# Altium PCB PCBChamberRTDs.PcbDoc (part 2 of 2)
Units mil, origin at the board's own origin, x right, y up, seen from the top; angles counter-clockwise.
Board outline 6299.21 x 4724.41 mil, 2 copper layers (Top Layer, Bottom Layer); 132 components, 182 nets, 689 pads, 214 vias.
Unrouted connection lines stored in the file: 100.
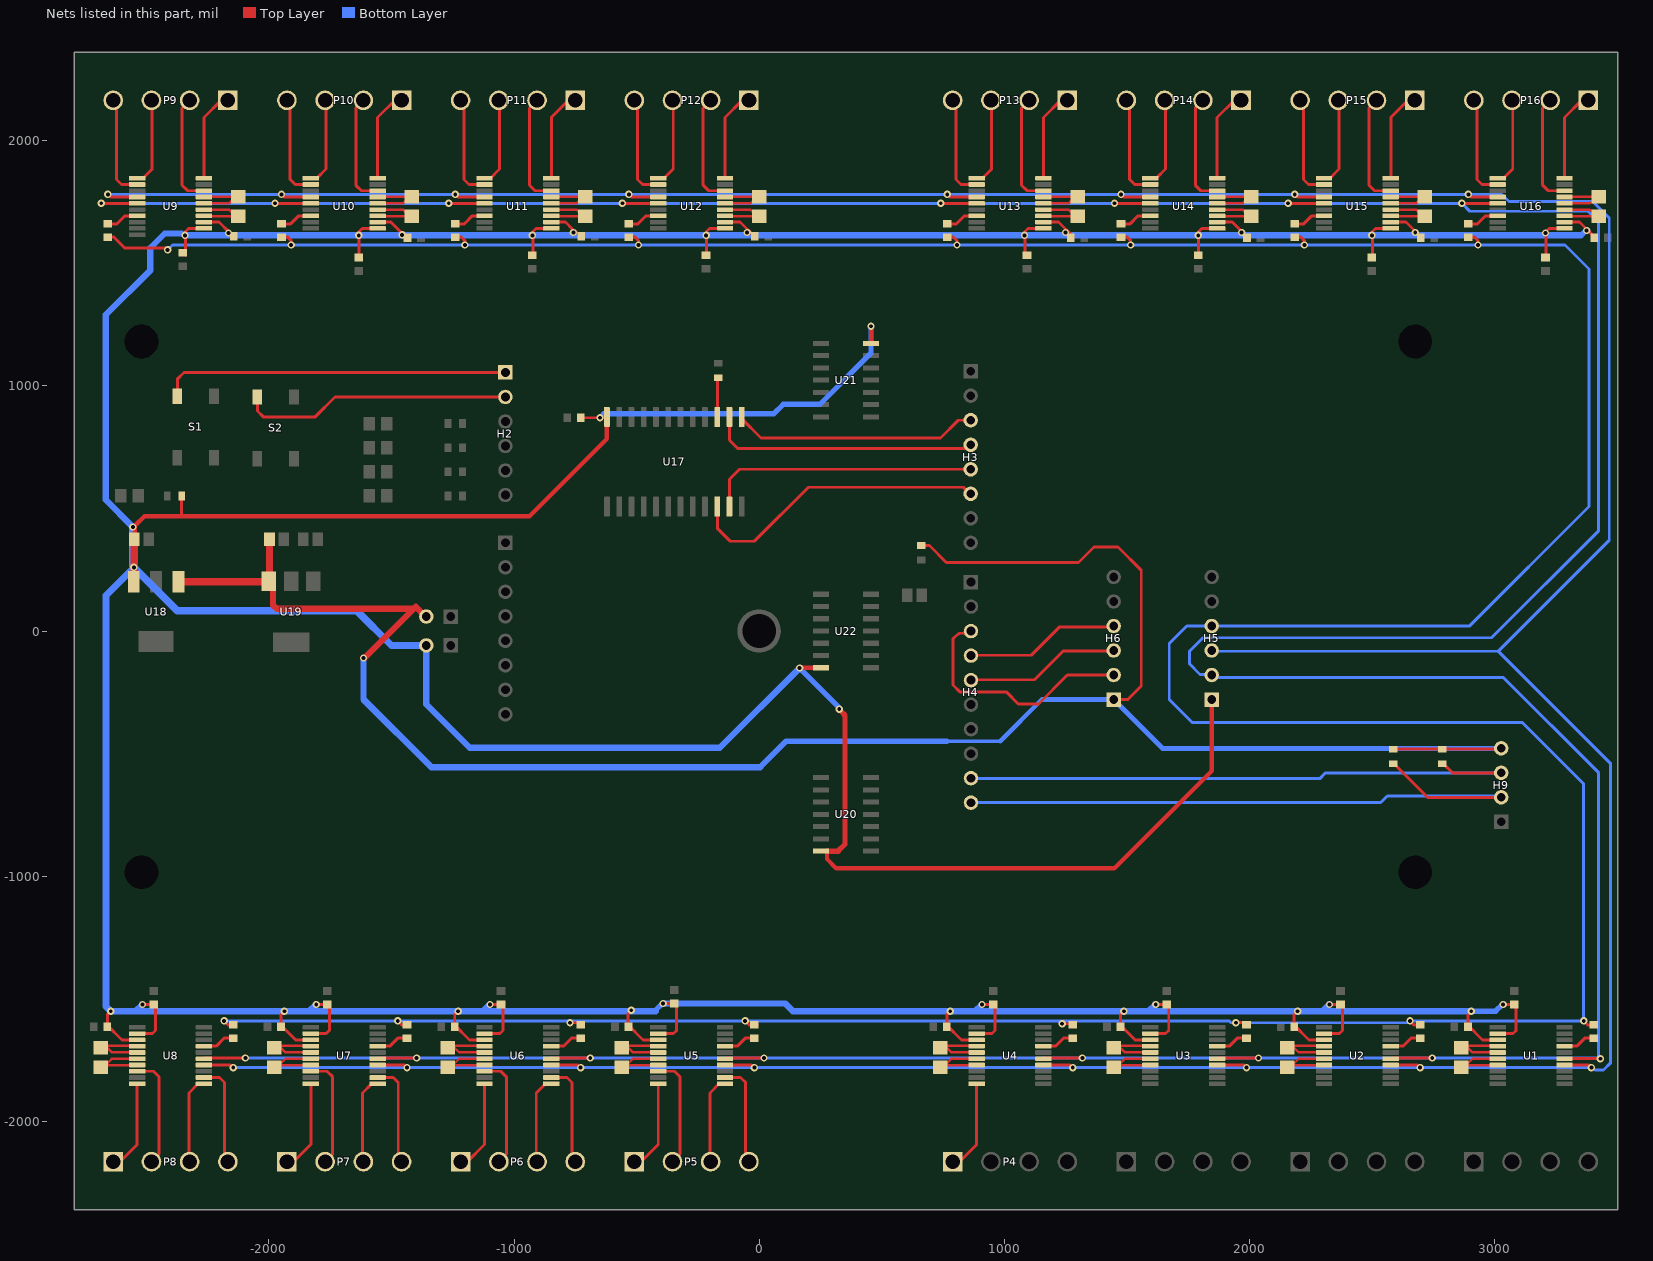
[diagram p2: the nets of this part, all layers, seen from the top]

## Via types
v1: diameter 30, hole 15.75, Top Layer to Bottom Layer, tented both sides, 214 vias

## Nets (pads, with @x,y where several pads share a name; then routed paths per layer and width w, separated by ;. In a path a pad name is that pad's centre, name@x,y a point inside that pad or via, vN(x,y) a via of type N, cw(c..) or ccw(c..) an arc to the next point about the centre after c; other vN are vias at no path point) (continued)
NetP4_4: P4.4 U4.10 | length 347.1
  Top Layer w12: P4.4@816.93,-2165.35 887.4,-2094.88 U4.10@887.4,-1847.44
NetP5_1: P5.1 U5.12 | length 401.9
  Top Layer w12: U5.12@-139.37,-1821.85 -75.79,-1821.85 -55.12,-1842.52 P5.1@-55.12,-2151.57
NetP5_2: P5.2 U5.11 | length 327.5
  Top Layer w12: P5.2@-200.79,-2159.45 -200.79,-1884.84 U5.11@-163.39,-1847.44
NetP5_3: P5.3 U5.8 | length 443.9
  Top Layer w12: U5.8@-411.81,-1796.26 -345.47,-1796.26 -322.83,-1818.9 -322.83,-2133.86 P5.3@-344.49,-2155.51
NetP5_4: P5.4 U5.10 | length 347.1
  Top Layer w12: P5.4@-482.28,-2165.35 -411.81,-2094.88 U5.10@-411.81,-1847.44
NetP6_1: P6.1 U6.12 | length 401.9
  Top Layer w12: U6.12@-848.03,-1821.85 -784.45,-1821.85 -763.78,-1842.52 P6.1@-763.78,-2151.57
NetP6_2: P6.2 U6.11 | length 327.5
  Top Layer w12: P6.2@-909.45,-2159.45 -909.45,-1884.84 U6.11@-872.05,-1847.44
NetP6_3: P6.3 U6.8 | length 443.9
  Top Layer w12: U6.8@-1120.47,-1796.26 -1054.13,-1796.26 -1031.5,-1818.9 -1031.5,-2133.86 P6.3@-1053.15,-2155.51
NetP6_4: P6.4 U6.10 | length 347.1
  Top Layer w12: P6.4@-1190.94,-2165.35 -1120.47,-2094.88 U6.10@-1120.47,-1847.44
NetP7_1: P7.1 U7.12 | length 401.9
  Top Layer w12: U7.12@-1556.69,-1821.85 -1493.11,-1821.85 -1472.44,-1842.52 P7.1@-1472.44,-2151.57
NetP7_2: P7.2 U7.11 | length 327.5
  Top Layer w12: P7.2@-1618.11,-2159.45 -1618.11,-1884.84 U7.11@-1580.71,-1847.44
NetP7_3: P7.3 U7.8 | length 443.9
  Top Layer w12: U7.8@-1829.13,-1796.26 -1762.8,-1796.26 -1740.16,-1818.9 -1740.16,-2133.86 P7.3@-1761.81,-2155.51
NetP7_4: P7.4 U7.10 | length 347.1
  Top Layer w12: P7.4@-1899.61,-2165.35 -1829.13,-2094.88 U7.10@-1829.13,-1847.44
NetP8_1: P8.1 U8.12 | length 401.9
  Top Layer w12: U8.12@-2265.35,-1821.85 -2201.77,-1821.85 -2181.1,-1842.52 P8.1@-2181.1,-2151.57
NetP8_2: P8.2 U8.11 | length 327.5
  Top Layer w12: P8.2@-2326.77,-2159.45 -2326.77,-1884.84 U8.11@-2289.37,-1847.44
NetP8_3: P8.3 U8.8 | length 443.9
  Top Layer w12: U8.8@-2537.8,-1796.26 -2471.46,-1796.26 -2448.82,-1818.9 -2448.82,-2133.86 P8.3@-2470.47,-2155.51
NetP8_4: P8.4 U8.10 | length 347.1
  Top Layer w12: P8.4@-2608.27,-2165.35 -2537.8,-2094.88 U8.10@-2537.8,-1847.44
NetP9_1: P9.1 U9.12 | length 401.9
  Top Layer w12: P9.1@-2622.05,2151.57 -2622.05,1842.52 -2601.38,1821.85 U9.12@-2537.8,1821.85
NetP9_2: P9.2 U9.11 | length 327.5
  Top Layer w12: U9.11@-2513.78,1847.44 -2476.38,1884.84 P9.2@-2476.38,2159.45
NetP9_3: P9.3 U9.8 | length 443.9
  Top Layer w12: P9.3@-2332.68,2155.51 -2354.33,2133.86 -2354.33,1818.9 -2331.69,1796.26 U9.8@-2265.35,1796.26
NetP9_4: P9.4 U9.10 | length 347.1
  Top Layer w12: U9.10@-2265.35,1847.44 -2265.35,2094.88 P9.4@-2194.88,2165.35
NetP10_1: P10.1 U10.12 | length 401.9
  Top Layer w12: P10.1@-1913.39,2151.57 -1913.39,1842.52 -1892.72,1821.85 U10.12@-1829.13,1821.85
NetP10_2: P10.2 U10.11 | length 327.5
  Top Layer w12: U10.11@-1805.12,1847.44 -1767.72,1884.84 P10.2@-1767.72,2159.45
NetP10_3: P10.3 U10.8 | length 443.9
  Top Layer w12: P10.3@-1624.02,2155.51 -1645.67,2133.86 -1645.67,1818.9 -1623.03,1796.26 U10.8@-1556.69,1796.26
NetP10_4: P10.4 U10.10 | length 347.1
  Top Layer w12: U10.10@-1556.69,1847.44 -1556.69,2094.88 P10.4@-1486.22,2165.35
NetP11_1: P11.1 U11.12 | length 401.9
  Top Layer w12: P11.1@-1204.72,2151.57 -1204.72,1842.52 -1184.05,1821.85 U11.12@-1120.47,1821.85
NetP11_2: P11.2 U11.11 | length 327.5
  Top Layer w12: U11.11@-1096.46,1847.44 -1059.05,1884.84 P11.2@-1059.05,2159.45
NetP11_3: P11.3 U11.8 | length 443.9
  Top Layer w12: P11.3@-915.35,2155.51 -937.01,2133.86 -937.01,1818.9 -914.37,1796.26 U11.8@-848.03,1796.26
NetP11_4: P11.4 U11.10 | length 347.1
  Top Layer w12: U11.10@-848.03,1847.44 -848.03,2094.88 P11.4@-777.56,2165.35
NetP12_1: P12.1 U12.12 | length 401.9
  Top Layer w12: P12.1@-496.06,2151.57 -496.06,1842.52 -475.39,1821.85 U12.12@-411.81,1821.85
NetP12_2: P12.2 U12.11 | length 327.5
  Top Layer w12: U12.11@-387.8,1847.44 -350.39,1884.84 P12.2@-350.39,2159.45
NetP12_3: P12.3 U12.8 | length 443.9
  Top Layer w12: P12.3@-206.69,2155.51 -228.35,2133.86 -228.35,1818.9 -205.71,1796.26 U12.8@-139.37,1796.26
NetP12_4: P12.4 U12.10 | length 347.1
  Top Layer w12: U12.10@-139.37,1847.44 -139.37,2094.88 P12.4@-68.9,2165.35
NetP13_1: P13.1 U13.12 | length 401.9
  Top Layer w12: P13.1@803.15,2151.57 803.15,1842.52 823.82,1821.85 U13.12@887.4,1821.85
NetP13_2: P13.2 U13.11 | length 327.5
  Top Layer w12: U13.11@911.42,1847.44 948.82,1884.84 P13.2@948.82,2159.45
NetP13_3: P13.3 U13.8 | length 443.9
  Top Layer w12: P13.3@1092.52,2155.51 1070.87,2133.86 1070.87,1818.9 1093.5,1796.26 U13.8@1159.84,1796.26
NetP13_4: P13.4 U13.10 | length 347.1
  Top Layer w12: U13.10@1159.84,1847.44 1159.84,2094.88 P13.4@1230.32,2165.35
NetP14_1: P14.1 U14.12 | length 401.9
  Top Layer w12: P14.1@1511.81,2151.57 1511.81,1842.52 1532.48,1821.85 U14.12@1596.06,1821.85
NetP14_2: P14.2 U14.11 | length 327.5
  Top Layer w12: U14.11@1620.08,1847.44 1657.48,1884.84 P14.2@1657.48,2159.45
NetP14_3: P14.3 U14.8 | length 443.9
  Top Layer w12: P14.3@1801.18,2155.51 1779.53,2133.86 1779.53,1818.9 1802.17,1796.26 U14.8@1868.5,1796.26
NetP14_4: P14.4 U14.10 | length 347.1
  Top Layer w12: U14.10@1868.5,1847.44 1868.5,2094.88 P14.4@1938.98,2165.35
NetP15_1: P15.1 U15.12 | length 401.9
  Top Layer w12: P15.1@2220.47,2151.57 2220.47,1842.52 2241.14,1821.85 U15.12@2304.72,1821.85
NetP15_2: P15.2 U15.11 | length 327.5
  Top Layer w12: U15.11@2328.74,1847.44 2366.14,1884.84 P15.2@2366.14,2159.45
NetP15_3: P15.3 U15.8 | length 443.9
  Top Layer w12: P15.3@2509.84,2155.51 2488.19,2133.86 2488.19,1818.9 2510.83,1796.26 U15.8@2577.17,1796.26
NetP15_4: P15.4 U15.10 | length 347.1
  Top Layer w12: U15.10@2577.17,1847.44 2577.17,2094.88 P15.4@2647.64,2165.35
NetP16_1: P16.1 U16.12 | length 401.9
  Top Layer w12: P16.1@2929.13,2151.57 2929.13,1842.52 2949.8,1821.85 U16.12@3013.39,1821.85
NetP16_2: P16.2 U16.11 | length 327.5
  Top Layer w12: U16.11@3037.4,1847.44 3074.8,1884.84 P16.2@3074.8,2159.45
NetP16_3: P16.3 U16.8 | length 443.9
  Top Layer w12: P16.3@3218.5,2155.51 3196.85,2133.86 3196.85,1818.9 3219.49,1796.26 U16.8@3285.83,1796.26
NetP16_4: P16.4 U16.10 | length 347.1
  Top Layer w12: U16.10@3285.83,1847.44 3285.83,2094.88 P16.4@3356.3,2165.35
NetR1_1: R1.1 U1.17 | length 143
  Top Layer w12: U1.17@3285.83,-1693.9 3335.63,-1693.9 3368.11,-1661.42 R1.1@3415.35,-1661.42
NetR2_1: R2.1 U2.17 | length 143
  Top Layer w12: U2.17@2577.17,-1693.9 2626.97,-1693.9 2659.45,-1661.42 R2.1@2706.69,-1661.42
NetR3_1: R3.1 U3.17 | length 143
  Top Layer w12: U3.17@1868.5,-1693.9 1918.31,-1693.9 1950.79,-1661.42 R3.1@1998.03,-1661.42
NetR4_1: R4.1 U1.6 U1.7 | length 261.2
  Top Layer w10: U1.7@3008.46,-1771.65 2883.86,-1771.65 2910.43,-1745.08 U1.6@3009.45,-1745.08
NetR4_2: R4.2 U1.4 U1.5 | length 261.2
  Top Layer w10: U1.4@3008.46,-1692.91 2883.86,-1692.91 2910.43,-1719.49 U1.5@3009.45,-1719.49
NetR5_1: R5.1 U2.6 U2.7 | length 261.2
  Top Layer w10: U2.7@2299.8,-1771.65 2175.2,-1771.65 2201.77,-1745.08 U2.6@2300.79,-1745.08
NetR5_2: R5.2 U2.4 U2.5 | length 261.2
  Top Layer w10: U2.4@2299.8,-1692.91 2175.2,-1692.91 2201.77,-1719.49 U2.5@2300.79,-1719.49
NetR6_1: R6.1 U3.6 U3.7 | length 261.2
  Top Layer w10: U3.7@1591.14,-1771.65 1466.54,-1771.65 1493.11,-1745.08 U3.6@1592.13,-1745.08
NetR6_2: R6.2 U3.4 U3.5 | length 261.2
  Top Layer w10: U3.4@1591.14,-1692.91 1466.54,-1692.91 1493.11,-1719.49 U3.5@1592.13,-1719.49
NetR7_1: R7.1 U4.17 | length 143
  Top Layer w12: U4.17@1159.84,-1693.9 1209.65,-1693.9 1242.13,-1661.42 R7.1@1289.37,-1661.42
NetR8_1: R8.1 U5.17 | length 143
  Top Layer w12: U5.17@-139.37,-1693.9 -89.57,-1693.9 -57.09,-1661.42 R8.1@-9.84,-1661.42
NetR9_1: R9.1 U6.17 | length 143
  Top Layer w12: U6.17@-848.03,-1693.9 -798.23,-1693.9 -765.75,-1661.42 R9.1@-718.5,-1661.42
NetR10_1: R10.1 U4.6 U4.7 | length 261.2
  Top Layer w10: U4.7@882.48,-1771.65 757.87,-1771.65 784.45,-1745.08 U4.6@883.46,-1745.08
NetR10_2: R10.2 U4.4 U4.5 | length 261.2
  Top Layer w10: U4.4@882.48,-1692.91 757.87,-1692.91 784.45,-1719.49 U4.5@883.46,-1719.49
NetR11_1: R11.1 U5.6 U5.7 | length 261.2
  Top Layer w10: U5.7@-416.73,-1771.65 -541.34,-1771.65 -514.76,-1745.08 U5.6@-415.75,-1745.08
NetR11_2: R11.2 U5.4 U5.5 | length 261.2
  Top Layer w10: U5.4@-416.73,-1692.91 -541.34,-1692.91 -514.76,-1719.49 U5.5@-415.75,-1719.49
NetR12_1: R12.1 U6.6 U6.7 | length 261.2
  Top Layer w10: U6.7@-1125.39,-1771.65 -1250,-1771.65 -1223.42,-1745.08 U6.6@-1124.41,-1745.08
NetR12_2: R12.2 U6.4 U6.5 | length 261.2
  Top Layer w10: U6.4@-1125.39,-1692.91 -1250,-1692.91 -1223.42,-1719.49 U6.5@-1124.41,-1719.49
NetR13_1: R13.1 U7.17 | length 143
  Top Layer w12: U7.17@-1556.69,-1693.9 -1506.89,-1693.9 -1474.41,-1661.42 R13.1@-1427.17,-1661.42
NetR14_1: R14.1 U8.17 | length 143
  Top Layer w12: U8.17@-2265.35,-1693.9 -2215.55,-1693.9 -2183.07,-1661.42 R14.1@-2135.83,-1661.42
NetR15_1: R15.1 U9.17 | length 143
  Top Layer w12: R15.1@-2667.32,1661.42 -2620.08,1661.42 -2587.6,1693.9 U9.17@-2537.8,1693.9
NetR16_1: R16.1 U7.6 U7.7 | length 261.2
  Top Layer w10: U7.7@-1834.05,-1771.65 -1958.66,-1771.65 -1932.09,-1745.08 U7.6@-1833.07,-1745.08
NetR16_2: R16.2 U7.4 U7.5 | length 261.2
  Top Layer w10: U7.4@-1834.06,-1692.91 -1958.66,-1692.91 -1932.09,-1719.49 U7.5@-1833.07,-1719.49
NetR17_1: R17.1 U8.6 U8.7 | length 262.6
  Top Layer w10: U8.7@-2542.72,-1771.65 -2667.32,-1771.65 -2640.75,-1745.08 U8.6@-2541.73,-1745.08
  Top Layer w12: U8.7@-2538.78,-1771.65 U8.7@-2537.8,-1770.67
NetR17_2: R17.2 U8.4 U8.5 | length 262.6
  Top Layer w10: U8.4@-2542.72,-1692.91 -2667.32,-1692.91 -2640.75,-1719.49 U8.5@-2541.73,-1719.49
  Top Layer w12: U8.4@-2538.78,-1692.91 U8.4@-2537.8,-1693.9
NetR18_1: R18.1 U10.17 | length 143
  Top Layer w12: R18.1@-1958.66,1661.42 -1911.42,1661.42 -1878.94,1693.9 U10.17@-1829.13,1693.9
NetR19_1: R19.1 U11.17 | length 143
  Top Layer w12: R19.1@-1250,1661.42 -1202.76,1661.42 -1170.28,1693.9 U11.17@-1120.47,1693.9
NetR20_1: R20.1 U9.6 U9.7 | length 261.2
  Top Layer w10: U9.6@-2261.42,1745.08 -2162.4,1745.08 -2135.83,1771.65 U9.7@-2260.43,1771.65
NetR20_2: R20.2 U9.4 U9.5 | length 261.2
  Top Layer w10: U9.5@-2261.42,1719.49 -2162.4,1719.49 -2135.83,1692.91 U9.4@-2260.43,1692.91
NetR21_1: R21.1 U10.6 U10.7 | length 261.2
  Top Layer w10: U10.6@-1552.76,1745.08 -1453.74,1745.08 -1427.17,1771.65 U10.7@-1551.77,1771.65
NetR21_2: R21.2 U10.4 U10.5 | length 261.2
  Top Layer w10: U10.5@-1552.76,1719.49 -1453.74,1719.49 -1427.17,1692.91 U10.4@-1551.77,1692.91
NetR22_1: R22.1 U11.6 U11.7 | length 261.2
  Top Layer w10: U11.6@-844.09,1745.08 -745.08,1745.08 -718.5,1771.65 U11.7@-843.11,1771.65
NetR22_2: R22.2 U11.4 U11.5 | length 261.2
  Top Layer w10: U11.5@-844.09,1719.49 -745.08,1719.49 -718.5,1692.91 U11.4@-843.11,1692.91
NetR23_1: R23.1 U12.17 | length 143
  Top Layer w12: R23.1@-541.34,1661.42 -494.09,1661.42 -461.61,1693.9 U12.17@-411.81,1693.9
NetR24_1: R24.1 U13.17 | length 143
  Top Layer w12: R24.1@757.87,1661.42 805.12,1661.42 837.6,1693.9 U13.17@887.4,1693.9
NetR25_1: R25.1 U14.17 | length 143
  Top Layer w12: R25.1@1466.54,1661.42 1513.78,1661.42 1546.26,1693.9 U14.17@1596.06,1693.9
NetR26_1: R26.1 U12.6 U12.7 | length 261.2
  Top Layer w10: U12.6@-135.43,1745.08 -36.42,1745.08 -9.84,1771.65 U12.7@-134.45,1771.65
NetR26_2: R26.2 U12.4 U12.5 | length 261.2
  Top Layer w10: U12.5@-135.43,1719.49 -36.42,1719.49 -9.84,1692.91 U12.4@-134.45,1692.91
NetR27_1: R27.1 U13.6 U13.7 | length 261.2
  Top Layer w10: U13.6@1163.78,1745.08 1262.8,1745.08 1289.37,1771.65 U13.7@1164.76,1771.65
NetR27_2: R27.2 U13.4 U13.5 | length 261.2
  Top Layer w10: U13.5@1163.78,1719.49 1262.8,1719.49 1289.37,1692.91 U13.4@1164.76,1692.91
NetR28_1: R28.1 U14.6 U14.7 | length 261.2
  Top Layer w10: U14.6@1872.44,1745.08 1971.46,1745.08 1998.03,1771.65 U14.7@1873.43,1771.65
NetR28_2: R28.2 U14.4 U14.5 | length 261.2
  Top Layer w10: U14.5@1872.44,1719.49 1971.46,1719.49 1998.03,1692.91 U14.4@1873.43,1692.91
NetR29_1: R29.1 U15.17 | length 143
  Top Layer w12: R29.1@2175.2,1661.42 2222.44,1661.42 2254.92,1693.9 U15.17@2304.72,1693.9
NetR30_1: R30.1 U16.17 | length 143
  Top Layer w12: R30.1@2883.86,1661.42 2931.1,1661.42 2963.58,1693.9 U16.17@3013.39,1693.9
NetR31_1: R31.1 U15.6 U15.7 | length 261.2
  Top Layer w10: U15.6@2581.1,1745.08 2680.12,1745.08 2706.69,1771.65 U15.7@2582.09,1771.65
NetR31_2: R31.2 U15.4 U15.5 | length 261.2
  Top Layer w10: U15.5@2581.1,1719.49 2680.12,1719.49 2706.69,1692.91 U15.4@2582.09,1692.91
NetR32_1: R32.1 U16.6 U16.7 | length 261.2
  Top Layer w10: U16.6@3289.76,1745.08 3388.78,1745.08 3415.35,1771.65 U16.7@3290.75,1771.65
NetR32_2: R32.2 U16.4 U16.5 | length 261.2
  Top Layer w10: U16.5@3289.76,1719.49 3388.78,1719.49 3415.35,1692.91 U16.4@3290.75,1692.91
NetR33_1: R33.1 U17.15 | length 161.9
  Top Layer w12: U17.15@-171.26,873.23 -169.29,875.2 -169.29,1031.5 R33.1@-167.32,1033.46
S0: H3.6 U17.10 | length 1247.5
  Top Layer w12: U17.10@-171.26,507.87 -169.29,505.91 -169.29,417.32 -118.11,366.14 -19.68,366.14 200.79,586.61 832.75,586.61 859.41,559.95 H3.6@863.31,559.95
S1: H3.5 U17.11 | length 1119.4
  Top Layer w12: U17.11@-121.26,507.87 -121.26,618.9 -80.2,659.95 H3.5@863.31,659.95 H3.5@870.08,659.95
S2: H3.4 U17.14 | length 1100
  Top Layer w12: U17.14@-121.26,873.23 -121.26,778.74 -86.61,744.09 834.72,744.09 850.58,759.95 H3.4@863.31,759.95
S3: H3.3 U17.13 | length 1004.5
  Top Layer w12: U17.13@-71.26,873.23 -71.26,865.76 7.1,787.4 740.16,787.4 812.71,859.95 H3.3@863.31,859.95
SCL: H4.10 H9.2 R41.2 | length 2675.3
  Top Layer w12: R41.2@2586.42,-541.54 R41.2@2586.61,-541.34 2590.55,-541.34 2727.95,-678.74 H9.2@3027.56,-678.74 H9.2@3027.36,-678.94
  Bottom Layer w12: H4.10@864.17,-700.2 2536.02,-700.2 2562.99,-673.23 3022.05,-673.23 H9.2@3027.56,-678.74
SCLK: H5.2 U1.15 U2.15 U3.15 U4.15 U5.15 U6.15 U7.15 U8.15 U9.15 U10.15 U11.15 U12.15 U13.15 U14.15 U15.15 U16.15 | length 20349.1
  Top Layer w12: v1(-2684.05,1745.08) U9.15@-2537.8,1745.08 ; U8.15@-2265.35,-1745.08 -2262.4,-1742.13 -2116.14,-1742.13 v1(-2096.46,-1742.13) ; v1(-1975.39,1745.08) U10.15@-1829.13,1745.08 ; U7.15@-1556.69,-1745.08 -1553.74,-1742.13 v1(-1397.64,-1742.13) ; v1(-1266.73,1745.08) U11.15@-1120.47,1745.08 ; U6.15@-848.03,-1745.08 -845.08,-1742.13 v1(-688.98,-1742.13) ; v1(-558.07,1745.08) U12.15@-411.81,1745.08 ; U5.15@-139.37,-1745.08 -136.42,-1742.13 v1(19.69,-1742.13) ; v1(741.14,1745.08) U13.15@887.4,1745.08 ; U4.15@1159.84,-1745.08 1162.8,-1742.13 v1(1318.9,-1742.13) ; v1(1449.8,1745.08) U14.15@1596.06,1745.08 ; U3.15@1868.5,-1745.08 1871.46,-1742.13 v1(2037.4,-1742.13) ; v1(2158.46,1745.08) U15.15@2304.72,1745.08 ; U2.15@2577.17,-1745.08 2580.13,-1742.12 v1(2746.06,-1742.12) ; v1(2867.13,1745.08) U16.15@3013.39,1745.08 ; U1.15@3285.83,-1745.08 v1(3432.09,-1745.08)
  Bottom Layer w12: v1(-2684.05,1745.08) v1(-1975.39,1745.08) v1(-1266.73,1745.08) v1(-558.07,1745.08) v1(741.14,1745.08) v1(1449.8,1745.08) v1(2158.46,1745.08) v1(2867.13,1745.08) 2899.61,1712.6 3381.89,1712.6 3425.2,1669.29 3425.2,409.45 2988.19,-27.56 2917.32,-27.56 ; v1(-2096.46,-1742.13) v1(-1397.64,-1742.13) v1(-688.98,-1742.13) v1(19.69,-1742.13) v1(1318.9,-1742.13) v1(2037.4,-1742.13) ; v1(2037.4,-1742.13) v1(2746.06,-1742.12) 3429.13,-1742.12 v1(3432.09,-1745.08) 3432.09,-1740.21 3425.2,-1733.32 3425.2,-578.74 3035.43,-188.98 1877.05,-188.98 1876.61,-188.53 1855.5,-188.53 1843.89,-176.92 1798.97,-176.92 1755.91,-133.86 1755.91,-82.68 1811.02,-27.56 2921.26,-27.56
SCLK-H: H4.3 H6.2 | length 1010.8
  Top Layer w12: H4.3@864.17,-0.2 855.17,-9.2 817.57,-9.2 814.96,-11.81 811.02,-11.81 791.34,-31.5 791.34,-220.47 818.9,-248.03 1007.87,-248.03 1057.48,-297.64 1139.37,-297.64 1257.48,-179.53 H6.2@1446.5,-179.53
SDA: H4.9 H9.3 R40.2 | length 2433.7
  Top Layer w12: R40.2@2783.46,-541.34 R40.2@2787.4,-541.34 2791.34,-541.34 2828.74,-578.74 H9.3@3027.56,-578.74
  Bottom Layer w12: H4.9@864.17,-600.2 866.34,-602.36 2287.4,-602.36 2311.02,-578.74 H9.3@3027.56,-578.74
SDI: H5.3 U1.14 U2.14 U3.14 U4.14 U5.14 U6.14 U7.14 U8.14 U9.14 U10.14 U11.14 U12.14 U13.14 U14.14 U15.14 U16.14 | length 18774.1
  Top Layer w12: v1(-2657.48,1781.5) -2646.65,1770.67 U9.14@-2537.8,1770.67 ; U8.14@-2265.35,-1770.67 -2156.5,-1770.67 v1(-2145.67,-1781.5) ; v1(-1948.82,1781.5) -1937.99,1770.67 U10.14@-1829.13,1770.67 ; U7.14@-1556.69,-1770.67 -1447.83,-1770.67 v1(-1437.01,-1781.5) ; v1(-1240.16,1781.5) -1229.33,1770.67 U11.14@-1120.47,1770.67 ; U6.14@-848.03,-1770.67 -739.17,-1770.67 v1(-728.35,-1781.5) ; v1(-531.5,1781.5) -520.67,1770.67 U12.14@-411.81,1770.67 ; U5.14@-139.37,-1770.67 -30.51,-1770.67 v1(-19.68,-1781.5) ; v1(767.72,1781.5) 778.54,1770.67 U13.14@887.4,1770.67 ; U4.14@1159.84,-1770.67 1268.7,-1770.67 v1(1279.53,-1781.5) ; v1(1476.38,1781.5) 1487.2,1770.67 U14.14@1596.06,1770.67 ; U3.14@1868.5,-1770.67 1977.36,-1770.67 v1(1988.19,-1781.5) ; v1(2185.04,1781.5) 2195.87,1770.67 U15.14@2304.72,1770.67 ; U2.14@2577.17,-1770.67 2686.02,-1770.67 v1(2696.85,-1781.5) ; v1(2893.7,1781.5) 2904.53,1770.67 U16.14@3013.39,1770.67 ; U1.14@3285.83,-1770.67 3384.84,-1770.67 v1(3395.67,-1781.5)
  Bottom Layer w12: v1(-2657.48,1781.5) v1(-1948.82,1781.5) v1(-1240.16,1781.5) v1(-531.5,1781.5) v1(767.72,1781.5) v1(1476.38,1781.5) v1(2185.04,1781.5) v1(2893.7,1781.5) 3029.53,1781.5 3059.06,1751.97 3401.57,1751.97 3468.5,1685.04 3468.5,370.08 3015.75,-82.68 ; v1(-2145.67,-1781.5) v1(-1437.01,-1781.5) v1(-728.35,-1781.5) v1(-19.68,-1781.5) v1(1279.53,-1781.5) v1(1988.19,-1781.5) v1(2696.85,-1781.5) v1(3395.67,-1781.5) 3400.54,-1781.5 3410.38,-1791.34 3444.88,-1791.34 3474.41,-1761.81 3474.41,-541.34 3019.69,-86.61 3015.75,-82.68 ; H5.3@1846.5,-79.53 1849.65,-82.68 3015.75,-82.68
SDI-H: H4.5 H6.3 | length 632.3
  Top Layer w12: H4.5@864.17,-200.2 865.45,-198.92 1123.92,-198.92 1242.03,-80.81 1445.22,-80.81 H6.3@1446.5,-79.53
SDO: H5.4 R1.2 R2.2 R3.2 R7.2 R8.2 R9.2 R13.2 R14.2 R15.2 R18.2 R19.2 R23.2 R24.2 R25.2 R29.2 R30.2 | length 18583.9
  Top Layer w12: R15.2@-2665.35,1608.27 -2633.86,1608.27 -2588.58,1562.99 -2421.26,1562.99 v1(-2413.39,1555.12) ; v1(-2183.07,-1590.55) -2165.35,-1608.27 R14.2@-2133.86,-1608.27 ; R18.2@-1956.69,1608.27 -1925.2,1608.27 -1909.45,1592.52 v1(-1909.45,1574.8) ; v1(-1474.41,-1590.55) -1456.69,-1608.27 R13.2@-1425.2,-1608.27 ; R19.2@-1248.03,1608.27 -1216.54,1608.27 -1200.79,1592.52 v1(-1200.79,1574.8) ; v1(-771.65,-1598.43) -726.38,-1598.43 R9.2@-720.47,-1604.33 ; R23.2@-539.37,1608.27 -507.87,1608.27 -492.13,1592.52 v1(-492.13,1574.8) ; v1(-57.09,-1590.55) -39.37,-1608.27 R8.2@-7.87,-1608.27 ; R24.2@759.84,1608.27 791.34,1608.27 807.09,1592.52 v1(807.09,1574.8) ; v1(1236.22,-1602.36) 1289.37,-1602.36 R7.2@1291.34,-1604.33 ; R25.2@1468.5,1608.27 1500,1608.27 1515.75,1592.52 v1(1515.75,1574.8) ; v1(1944.88,-1598.43) 1946.76,-1596.55 1978.44,-1596.55 R3.2@1988.19,-1606.3 ; R3.2@1988.19,-1608.27 R3.2@1996.06,-1608.27 ; R29.2@2177.17,1608.27 2208.66,1608.27 2224.41,1592.52 v1(2224.41,1574.8) ; v1(2655.51,-1590.55) 2673.23,-1608.27 R2.2@2704.72,-1608.27 ; R30.2@2885.83,1608.27 2917.32,1608.27 2933.07,1592.52 v1(2933.07,1574.8) ; v1(3364.17,-1590.55) 3381.89,-1608.27 R1.2@3413.39,-1608.27
  Bottom Layer w12: v1(-2413.39,1555.12) -2393.7,1574.8 v1(-1909.45,1574.8) v1(-1200.79,1574.8) v1(-492.13,1574.8) v1(807.09,1574.8) v1(1515.75,1574.8) v1(2224.41,1574.8) v1(2933.07,1574.8) 3287.94,1574.8 3385.83,1476.91 3385.83,507.87 2897.64,19.69 2850.39,19.69 ; v1(-2183.07,-1590.55) v1(-1474.41,-1590.55) -771.65,-1590.55 v1(-57.09,-1590.55) 1220.47,-1590.55 ; v1(1236.22,-1602.36) 1232.28,-1602.36 1220.47,-1590.55 ; 2847.24,20.47 H5.4@1846.5,20.47 1744.88,20.47 1673.23,-51.18 1673.23,-279.53 1767.72,-374.02 3114.17,-374.02 3364.17,-624.02 v1(3364.17,-1590.55) v1(2655.51,-1590.55) 2647.64,-1598.43 v1(1944.88,-1598.43) 1925.2,-1598.43 1917.32,-1590.55 1236.22,-1590.55 1220.47,-1590.55
SDO-H: H4.4 H6.4 | length 622.7
  Top Layer w12: H4.4@864.17,-100.2 865.45,-98.92 1109.74,-98.92 1224.41,15.75 H6.4@1437.01,15.75 ; H6.4@1445.22,19.19 H6.4@1446.5,20.47
SW1: H2.1 S1.2 | length 1419
  Top Layer w12: S1.2@-2374.02,958.66 -2374.02,1027.56 -2346.62,1054.95 H2.1@-1035.24,1054.95
SW2: H2.2 S2.2 | length 1112.4
  Top Layer w12: S2.2@-2047.24,954.72 -2047.24,897.64 -2023.62,874.02 -1811.02,874.02 -1730.09,954.95 H2.2@-1035.24,954.95
V3.3: C1.2 C2.2 C3.2 C4.2 C5.2 C6.2 C7.2 C8.2 C9.2 C10.2 C11.2 C12.2 C13.2 C14.2 C15.2 C16.2 C17.2 C18.2 C19.2 C20.2 C21.2 C22.2 C23.2 C24.2 C25.2 C26.2 C27.2 C28.2 C29.2 C30.2 C31.2 C32.2 C33.1 C36.2 H5.1 H7.2 R38.1 U1.2 U1.3 U2.2 U2.3 U3.2 U3.3 U4.2 U4.3 U5.2 U5.3 U6.2 U6.3 U7.2 U7.3 U8.2 U8.3 U9.2 U9.3 U10.2 U10.3 U11.2 U11.3 U12.2 U12.3 U13.2 U13.3 U14.2 U14.3 U15.2 U15.3 U16.2 U16.3 U17.24 U18.3 U20.14 U21.14 U22.14 | length 31486
  Top Layer w12: C14.2@-2659.45,-1614.17 -2659.45,-1564.96 v1(-2645.67,-1551.18) ; C14.2@-2659.45,-1606.3 -2659.45,-1608.27 -2599.41,-1668.31 U8.3@-2537.8,-1668.31 ; U18.3@-2551.63,200.74 U18.3@-2549.21,203.16 ; v1@-2549.21,431.1 v1@-2547.24,429.13 ; U8.2@-2537.8,-1642.72 -2475.39,-1642.72 -2462.6,-1629.92 -2462.6,-1531.5 C17.2@-2470.47,-1523.62 v1(-2515.75,-1523.62) ; R38.1@-2356.3,551.18 -2356.3,470.47 -2354.33,468.5 ; C20.2@-2340.55,1531.5 -2340.55,1629.92 -2327.76,1642.72 U9.2@-2265.35,1642.72 ; U9.3@-2265.35,1668.31 -2203.74,1668.31 v1@-2162.4,1626.97 ; C13.2@-1950.79,-1614.17 -1950.79,-1564.96 v1(-1937.01,-1551.18) ; C13.2@-1950.79,-1608.27 -1890.75,-1668.31 U7.3@-1829.13,-1668.31 ; U7.2@-1829.13,-1642.72 -1766.73,-1642.72 -1753.94,-1629.92 -1753.94,-1531.5 C16.2@-1761.81,-1523.62 v1(-1807.09,-1523.62) ; C21.2@-1631.89,1531.5 v1@-1631.89,1614.17 ; -1631.89,1629.92 -1619.09,1642.72 U10.2@-1556.69,1642.72 ; U10.3@-1556.69,1668.31 -1502.95,1668.31 -1460.14,1625.49 -1460.14,1619.59 v1(-1456.69,1616.14) ; C9.2@-1242.13,-1614.17 -1242.13,-1564.96 v1(-1228.35,-1551.18) ; C9.2@-1242.13,-1608.27 -1182.09,-1668.31 U6.3@-1120.47,-1668.31 ; U6.2@-1120.47,-1642.72 -1058.07,-1642.72 -1045.28,-1629.92 C12.2@-1045.28,-1531.5 ; v1(-1098.42,-1523.62) C12.2@-1053.15,-1523.62 ; C22.2@-923.23,1531.5 v1@-923.23,1614.17 ; -923.23,1629.92 -910.43,1642.72 U11.2@-848.03,1642.72 ; U11.3@-848.03,1668.31 -790.35,1668.31 -761.32,1639.27 -761.32,1629.43 v1(-757.87,1625.98) ; v1@-750.98,1632.87 C19.2@-726.38,1608.27 ; C33.1@-728.35,870.08 -624.41,870.08 U17.24@-621.26,873.23 ; C8.2@-535.43,-1610.24 -535.43,-1561.02 v1(-521.65,-1547.24) ; C8.2@-533.46,-1608.27 -473.42,-1668.31 U5.3@-411.81,-1668.31 ; U5.2@-411.81,-1642.72 -349.41,-1642.72 -336.61,-1629.92 C11.2@-336.61,-1531.5 ; v1(-391.73,-1519.69) C11.2@-346.46,-1519.69 ; C26.2@-214.57,1531.5 v1@-214.57,1614.17 ; -214.57,1629.92 -201.77,1642.72 U12.2@-139.37,1642.72 ; U12.3@-139.37,1668.31 -77.76,1668.31 C23.2@-17.72,1608.27 ; C7.2@765.75,-1614.17 765.75,-1564.96 v1(779.53,-1551.18) ; C7.2@765.75,-1608.27 825.79,-1668.31 U4.3@887.4,-1668.31 ; U4.2@887.4,-1642.72 949.8,-1642.72 962.6,-1629.92 C10.2@962.6,-1531.5 ; v1(909.45,-1523.62) C10.2@954.73,-1523.62 ; C27.2@1084.65,1531.5 v1@1084.65,1614.17 ; 1084.65,1629.92 1097.44,1642.72 U13.2@1159.84,1642.72 ; U13.3@1159.84,1668.31 1221.46,1668.31 C24.2@1281.5,1608.27 ; C3.2@1474.41,-1614.17 1474.41,-1564.96 v1(1488.19,-1551.18) ; C3.2@1474.41,-1608.27 1534.45,-1668.31 U3.3@1596.06,-1668.31 ; U3.2@1596.06,-1642.72 1658.46,-1642.72 1671.26,-1629.92 C6.2@1671.26,-1531.5 ; v1(1618.11,-1523.62) C6.2@1663.39,-1523.62 ; C28.2@1793.31,1531.5 v1@1793.31,1614.17 ; 1793.31,1629.92 1806.1,1642.72 U14.2@1868.5,1642.72 ; U14.3@1868.5,1668.31 1930.12,1668.31 C25.2@1990.16,1608.27 ; C2.2@2183.07,-1614.17 2183.07,-1564.96 v1(2196.85,-1551.18) ; C2.2@2183.07,-1608.27 2243.11,-1668.31 U2.3@2304.72,-1668.31 ; U2.2@2304.72,-1642.72 2367.13,-1642.72 2379.92,-1629.92 C5.2@2379.92,-1531.5 ; v1(2326.77,-1523.62) C5.2@2372.05,-1523.62 ; C31.2@2501.97,1531.5 v1@2501.97,1614.17 ; 2501.97,1629.92 2514.76,1642.72 U15.2@2577.17,1642.72 ; U15.3@2577.17,1668.31 2638.78,1668.31 C29.2@2698.82,1608.27 ; C1.2@2891.73,-1614.17 2891.73,-1564.96 v1(2905.51,-1551.18) ; C1.2@2891.73,-1608.27 2951.77,-1668.31 U1.3@3013.39,-1668.31 ; U1.2@3013.39,-1642.72 3075.79,-1642.72 3088.58,-1629.92 C4.2@3088.58,-1531.5 ; v1(3035.43,-1523.62) C4.2@3080.71,-1523.62 ; C30.2@3210.63,1531.5 3210.63,1629.92 3223.43,1642.72 U16.2@3285.83,1642.72 ; U16.3@3285.83,1668.31 3347.44,1668.31 C32.2@3407.48,1608.27
  Top Layer w18: C36.2@-2549.21,374.02 -2547.24,375.98 -2547.24,429.13 -2507.87,468.5 -2354.33,468.5 -937.01,468.5 -621.26,784.25 U17.24@-621.26,873.23 ; v1@165.35,-153.54 168.9,-150 U22.14@252.33,-150 ; U20.14@275.33,-898.03 276.83,-899.53 276.83,-930.37 314.96,-968.5 1448.82,-968.5 1846.5,-570.83 H5.1@1846.5,-279.53 ; U21.14@456.33,1173.62 v1(456.33,1243.73) v1@456.69,1244.09
  Top Layer w22: U20.14@275.33,-898.03 322.44,-898.03 350.39,-870.08 350.39,-346.46 346.46,-342.52 346.46,-339.67 v1@326.77,-319.98
  Top Layer w26: v1@326.77,-319.98 v1(326.77,-318.9)
  Top Layer w30: U18.3@-2549.21,203.16 C36.2@-2549.21,374.02
  Bottom Layer w22: -2546.55,-1551.18 -2518.99,-1523.62 v1(-2515.75,-1523.62) ; -2356.05,1622.05 -2352.18,1618.17 -2348.68,1618.17 v1@-2344.68,1614.17 ; -1837.89,-1551.18 -1810.33,-1523.62 v1(-1807.09,-1523.62) ; -1129.23,-1551.18 -1101.67,-1523.62 v1(-1098.42,-1523.62) ; v1(-649.61,870.08) -633.86,885.83 59.06,885.83 98.43,925.2 248.03,925.2 456.33,1133.5 v1(456.33,1243.73) ; -422.54,-1547.24 -394.98,-1519.69 v1(-391.73,-1519.69) ; v1(165.17,-150.75) v1@330.05,-315.62 ; 878.64,-1551.18 906.2,-1523.62 v1(909.45,-1523.62) ; 1587.3,-1551.18 1614.86,-1523.62 v1(1618.11,-1523.62) ; 2295.97,-1551.18 2323.52,-1523.62 v1(2326.77,-1523.62) ; v1(2905.51,-1551.18) 3004.63,-1551.18 3032.19,-1523.62 v1(3035.43,-1523.62) ; 3353.05,1614.17 3372.74,1633.86 v1(3375.98,1633.86)
  Bottom Layer w24: -2484.25,1562.99 -2425.2,1622.05 -2356.05,1622.05
  Bottom Layer w26: v1@-2559.06,424.66 -2559.06,268.8 -2551.18,260.92 v1(-2551.18,259.84) ; v1(-2555.12,424.66) -2665.35,534.89 -2665.35,1289.92 -2484.25,1471.02 -2484.25,1562.99 ; -2546.55,-1551.18 v1(-1937.01,-1551.18) -1837.89,-1551.18 v1(-1228.35,-1551.18) -1129.23,-1551.18 -521.65,-1551.18 -422.54,-1551.18 ; v1@-2344.68,1614.17 v1(-2342.52,1614.17) -2165.35,1614.17 v1(-1633.86,1614.17) -1456.69,1614.17 v1(-925.2,1614.17) -757.87,1614.17 v1(-216.54,1614.17) -49.21,1614.17 v1(1082.68,1614.17) 1250,1614.17 v1(1791.34,1614.17) 1968.5,1614.17 v1(2500,1614.17) 2677.17,1614.17 3208.66,1614.17 3353.05,1614.17 ; H7.2@-1358.27,-58.83 -1358.27,-299.21 -1181.1,-476.38 -160.46,-476.38 v1(165.17,-150.75) ; v1(-391.73,-1519.69) 106.3,-1519.69 137.8,-1551.18 v1(779.53,-1551.18) 878.64,-1551.18 v1(1488.19,-1551.18) 1587.3,-1551.18 v1(2196.85,-1551.18) 2295.97,-1551.18 v1(2905.51,-1551.18)
  Bottom Layer w28: v1(-2551.18,259.84) -2665.35,145.67 -2665.35,-1531.5 v1(-2645.67,-1551.18) -2546.55,-1551.18
  Bottom Layer w30: v1(-2551.18,259.84) -2374.02,82.68 -1641.73,82.68 -1500.23,-58.83 H7.2@-1358.27,-58.83
  other v1: -2165.35,1624.02 3208.66,1624.02 -49.21,1625.98 1250,1625.98 1968.5,1625.98 2677.17,1625.98
VDD: C35.2 H6.1 H8.2 H9.4 R39.1 R40.1 R41.1 U18.1 U19.3 | length 8740.5
  Top Layer w12: U19.3@-2002.02,200.74 U19.3@-2000,202.76 U19.3@-1998.03,204.72 ; R39.1@661.42,348.43 694.88,348.43 763.78,279.53 1303.15,279.53 1366.14,342.52 1464.57,342.52 1559.06,248.03 1559.06,-224.41 1503.94,-279.53 H6.1@1446.5,-279.53 ; R41.1@2586.61,-482.28 2588.39,-480.51 R40.1@2785.63,-480.51 ; R40.1@2785.43,-480.31 R40.1@2785.63,-480.51 ; R40.1@2787.4,-482.28 R40.1@2785.63,-480.51 ; H9.4@3027.56,-478.74 3025.79,-480.51 R40.1@2785.63,-480.51
  Top Layer w26: U19.3@-2000,202.76 -1983.47,186.23 -1983.47,105.78 -1968.24,90.55 -1409.45,90.55 -1609.47,-109.47 -1613.41,-109.47 v1(-1614.17,-110.24) ; -1401.57,98.43 -1362.2,59.06 H8.2@-1358.27,59.06
  Top Layer w30: U18.1@-2369.63,200.74 U19.3@-2002.02,200.74 ; U19.3@-1998.03,204.72 C35.2@-1998.03,374.02
  Bottom Layer w16: 764.84,-449.72 983.35,-449.72
  Bottom Layer w18: 983.35,-449.72 1153.54,-279.53
  Bottom Layer w20: 1153.54,-279.53 H6.1@1446.5,-279.53 1645.71,-478.74 H9.4@3027.56,-478.74
  Bottom Layer w22: 109.33,-449.72 764.84,-449.72
  Bottom Layer w24: 3.94,-555.12 109.33,-449.72
  Bottom Layer w26: v1(-1614.17,-110.24) -1614.17,-279.53 -1338.58,-555.12 3.94,-555.12
pads on no net: H1.6 H1.7 H1.8 H3.1 H3.2 H3.7 H3.8 H4.1 H4.8 S1.3 S1.4 S2.3 S2.4 U1.20 U2.20 U3.20 U4.20 U5.20 U6.20 U7.20 U8.20 U9.20 U10.20 U11.20 U12.20 U13.20 U14.20 U15.20 U16.20 U18.4 U19.4 U20.3 U20.11 U21.3 U21.11 U22.3 U22.8 U22.9 U22.10 U22.11 U22.12 U22.13

## Polygon pours and split planes (outlines as drawn)
GND on Top Layer "GND_L01_P001" (solid, remove dead copper, pour order 1): 3503.94,2362.2 -2795.28,2362.2 -2795.28,-2362.2 3503.94,-2362.2
GND on Bottom Layer "GND_L02_P000" (solid, remove dead copper, pour order 0): 3503.94,2364.45 -2795.63,2364.45 -2795.63,-2359.96 3503.94,-2359.96

## Keep-outs
Keep-Out Layer:
  the board outline again, w10

## Silkscreen, mask and mechanical layers (free items; w line width, h text height)
Top Overlay:
  text "Power / 3.3V" at -2755.19,637.8 h60
  text "A.S. / Jan 2022" at 2862.2,-49.21 h60 r90
  text "16-Channel / RTD Sensor / Reader" at -2612.93,-724.41 h80
  text "+5 / SDA / SCL / 0" at 3106.3,-814.96 h65
Bottom Overlay:
  text "F R F R / - - + +" at -2657.48,2094.49 h75 r180
  text "F R F R / - - + +" at -1948.82,2094.49 h75 r180
  text "F R F R / - - + +" at -1240.16,2094.49 h75 r180
  text "F R F R / - - + +" at -531.5,2094.49 h75 r180
  text "F R F R / - - + +" at 767.72,2094.49 h75 r180
  text "F R F R / - - + +" at 1476.38,2094.49 h75 r180
  text "F R F R / - - + +" at 2185.04,2094.49 h75 r180
  text "F R F R / - - + +" at 2893.7,2094.49 h75 r180
  text "F R F R / - - + +" at -2145.67,-2094.49 h75
  text "F R F R / - - + +" at -1437.01,-2094.49 h75
  text "F R F R / - - + +" at -728.35,-2094.49 h75
  text "F R F R / - - + +" at -19.68,-2094.49 h75
  text "F R F R / - - + +" at 1279.53,-2094.49 h75
  text "F R F R / - - + +" at 1988.19,-2094.49 h75
  text "F R F R / - - + +" at 2696.85,-2094.49 h75
  text "F R F R / - - + +" at 3405.51,-2094.49 h75